# Altium PCB PCB1.PcbDoc
Units mm, origin at the board's own origin, x right, y up, seen from the top; angles counter-clockwise.
Board outline 97 x 63 mm, 2 copper layers (Top Layer, Bottom Layer); 47 components, 44 nets, 228 pads, 0 vias.
Unrouted connection lines stored in the file: 153.
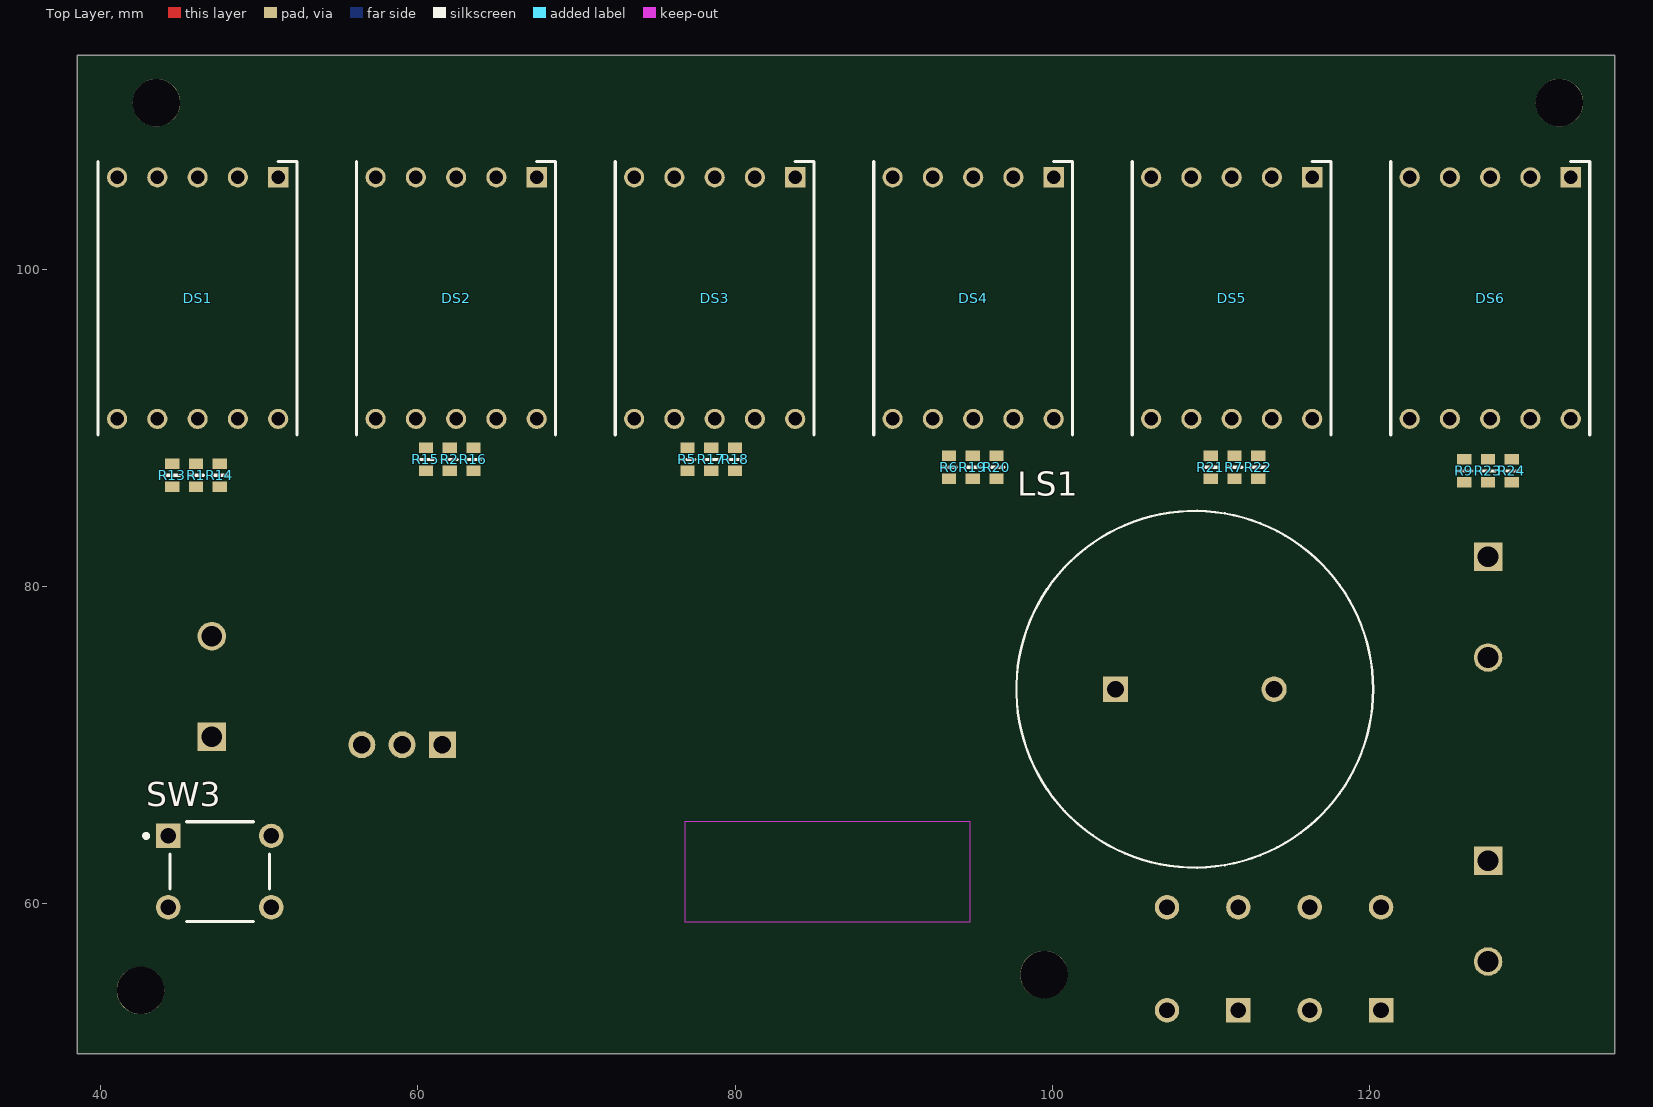
[diagram p0: Top Layer view]
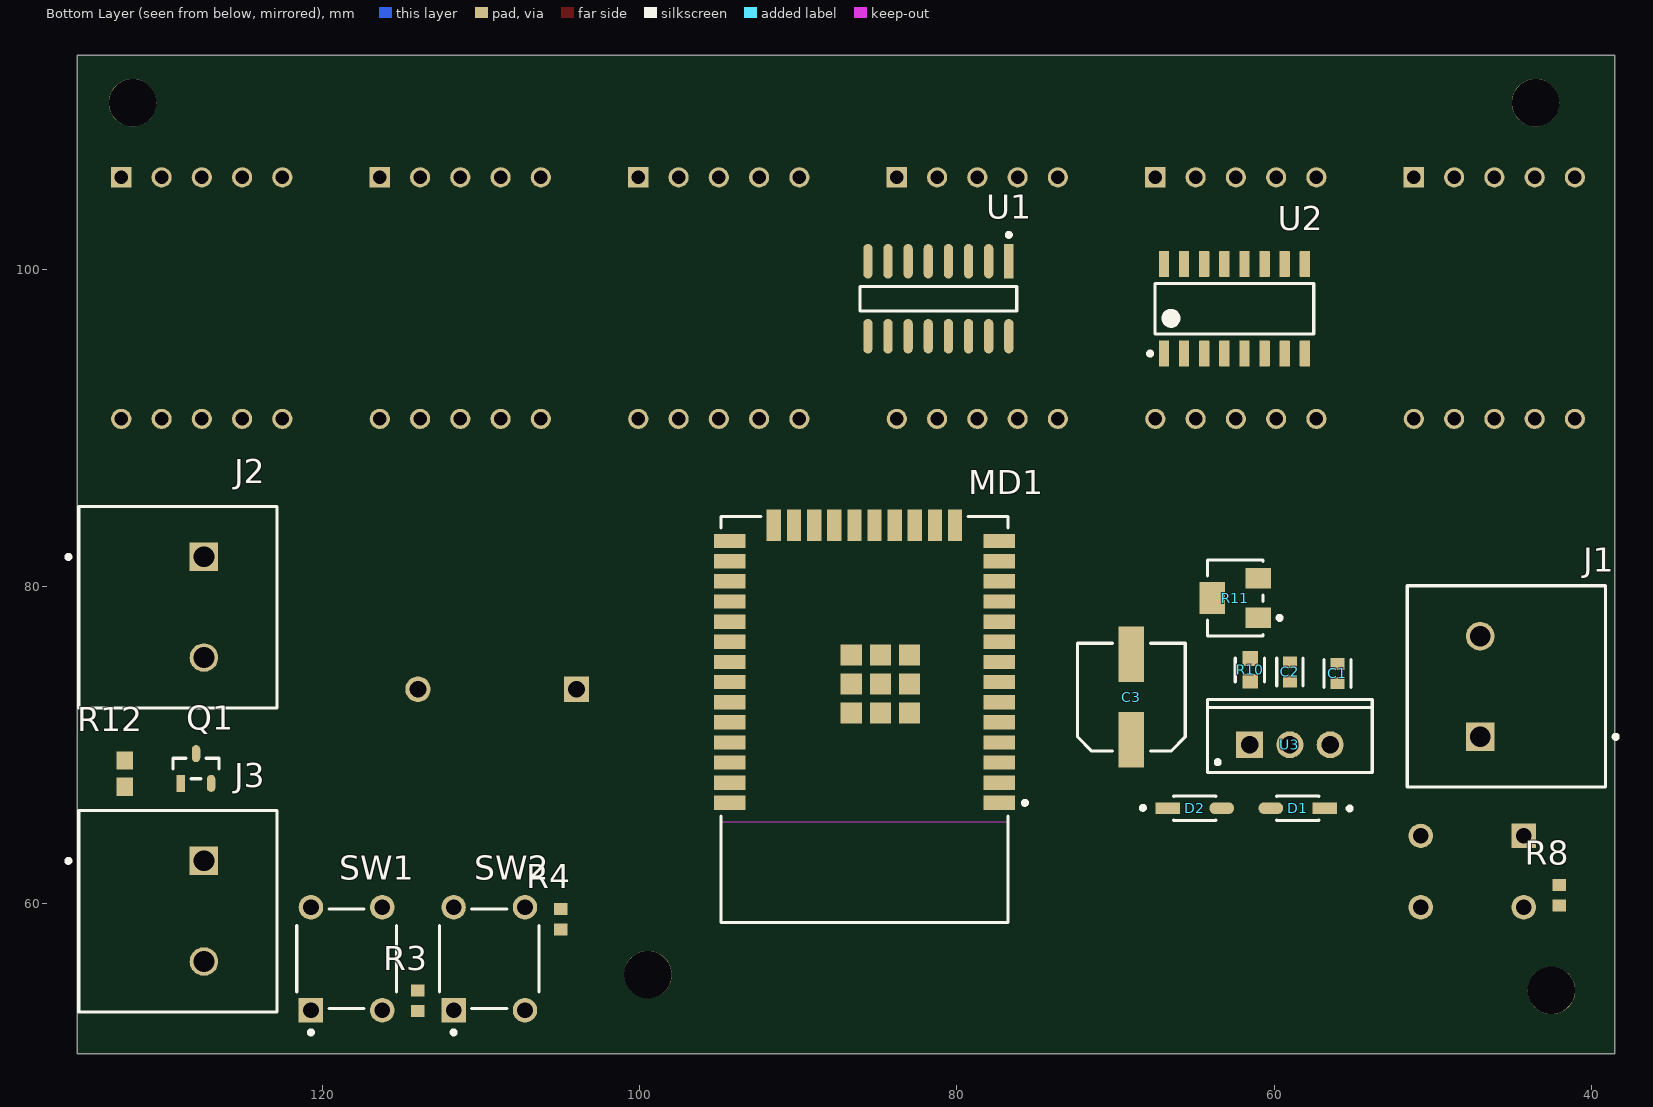
[diagram p1: Bottom Layer view, seen from below]

## Layer stack, top to bottom
Top Solder: solder mask 0.0102, Solder Resist, Dk 3.5
Top Layer: signal copper 0.0356
Dielectric 1: dielectric 0.32, FR-4, Dk 4.8
Bottom Layer: signal copper 0.0356
Bottom Solder: solder mask 0.0102, Solder Resist, Dk 3.5

## Board outline
38.5,50.5 135.5,50.5 135.5,113.5 38.5,113.5

## Design rules (kind name [scope] priority, off if disabled: settings)
Clearance [All] p1: gap=0.254 ignorepadtopadclearanceinfootprint=FALSE except(0: Arc-Hole Track-Hole SMDPad-Hole THPad-Hole Via-Hole Fill-Hole Poly-Hole Region-Hole Text-Hole)
PolygonConnect [All] p1: connectstyle=Relief reliefconductorwidth=0.254 reliefentries=4 polygonreliefangle="90 Angle" airgapwidth=0.254
RoutingVias [All] p1: holewidth=0.711 width=1.27 viastyle="Through Hole" minholewidth=0.711 minwidth=1.27 maxholewidth=0.711 maxwidth=1.27
SolderMaskExpansion [All] p1: expansion=0.102 istentingtop=FALSE
Width [All] p1: maxlimit=0.254 minlimit=0.254 preferedwidth=0.254
30 further rules are at their usual default settings.

## Components (designator, comment, footprint, x,y, rotation, side; value= is the part's Value field where it differs from the comment)
C1 "0.1uF" FP-C0603C-CF-MFG 56,74.5 r90 bottom value="0.10 μF"
C2 "1uF" FP-C0603C105K3PACTU-MFG 59,74.6 r90 bottom
C3 "10uF" NIC-CAPA2-6.3X5.8_V 69,73 r90 bottom
D1 "1N5819HW-7-F" FP-SOD123-IPC_A 58.5,66 r0 bottom
D2 "1N5819HW-7-F" FP-SOD123-IPC_A 65,66 r180 bottom
DS1 "HDSP-515A" DIPS1524W55P254L1240H800Q10N 51.181,105.791 r270 top
DS2 "HDSP-515A" DIPS1524W55P254L1240H800Q10N 67.488,105.791 r270 top
DS3 "HDSP-515A" DIPS1524W55P254L1240H800Q10N 83.795,105.791 r270 top
DS4 "HDSP-515A" DIPS1524W55P254L1240H800Q10N 100.101,105.791 r270 top
DS5 "HDSP-515A" DIPS1524W55P254L1240H800Q10N 116.408,105.791 r270 top
DS6 "HDSP-515A" DIPS1524W55P254L1240H800Q10N 132.715,105.791 r270 top
J1 "1714955" PHOE-1714955_V 47,73.675 r90 bottom
J2 "1714955" PHOE-1714955_V 127.5,78.675 r270 bottom
J3 "1714955" PHOE-1714955_V 127.5,59.5 r270 bottom
LS1 "PKM22EPPH4001-B0" FP-PKM22EPPH4001-B0-MFG 109,73.5 r0 top
MD1 "ESP32-WROOM-32" FP-ESP32-WROOM-32-MFG 85.835,71.595 r0 bottom
Q1 "NDS355AN" FP-527AG-01-IPC_C 128,68.5 r90 bottom
R1 "ERJ-3EKF33R0V" FP-ERJ3EK-MFG 46,87 r270 top
R2 "ERJ-3EKF33R0V" FP-ERJ3EK-MFG 62,88 r270 top
R3 "10kR" RESC1609X55X30LL15T15 114,53.85 r90 bottom
R4 "10kR" RESC1609X55X30LL15T15 105,59 r270 bottom
R5 "ERJ-3EKF33R0V" FP-ERJ3EK-MFG 77,88 r270 top
R6 "ERJ-3EKF33R0V" FP-ERJ3EK-MFG 93.5,87.5 r270 top
R7 "ERJ-3EKF33R0V" FP-ERJ3EK-MFG 111.5,87.5 r270 top
R8 "10kR" RESC1609X55X30LL15T15 42,60.5 r90 bottom
R9 "ERJ-3EKF33R0V" FP-ERJ3EK-MFG 126,87.275 r270 top
R10 "240R" FP-CRCW0603-e3-IPC_B 61.5,74.715 r270 bottom
R11 "5k" BOUR-3214W_V 62.45,79.25 r0 bottom
R12 "100R" RESC1609X55X30ML10T20 132.5,68.175 r270 bottom
R13 "ERJ-3EKF33R0V" FP-ERJ3EK-MFG 44.5,87 r270 top
R14 "ERJ-3EKF33R0V" FP-ERJ3EK-MFG 47.5,87 r270 top
R15 "ERJ-3EKF33R0V" FP-ERJ3EK-MFG 60.5,88 r270 top
R16 "ERJ-3EKF33R0V" FP-ERJ3EK-MFG 63.5,88 r270 top
R17 "ERJ-3EKF33R0V" FP-ERJ3EK-MFG 78.5,88 r270 top
R18 "ERJ-3EKF33R0V" FP-ERJ3EK-MFG 80,88 r270 top
R19 "ERJ-3EKF33R0V" FP-ERJ3EK-MFG 95,87.5 r270 top
R20 "ERJ-3EKF33R0V" FP-ERJ3EK-MFG 96.5,87.5 r270 top
R21 "ERJ-3EKF33R0V" FP-ERJ3EK-MFG 110,87.5 r270 top
R22 "ERJ-3EKF33R0V" FP-ERJ3EK-MFG 113,87.5 r270 top
R23 "ERJ-3EKF33R0V" FP-ERJ3EK-MFG 127.5,87.275 r270 top
R24 "ERJ-3EKF33R0V" FP-ERJ3EK-MFG 129,87.275 r270 top
SW1 "1-1825910-0" FP-1-1825910-0-MFG 118.5,56.5 r270 bottom
SW2 "1-1825910-0" FP-1-1825910-0-MFG 109.5,56.5 r270 bottom
SW3 "1-1825910-0" FP-1-1825910-0-MFG 47.5,62 r180 top
U1 "SN74HC594D" FP-D0016A-IPC_B 81.175,98.134 r270 bottom
U2 "CD4543BMT" D0016A_M 62.5,97.5 r90 bottom
U3 "LM317T" TO-220 59,70 r180 bottom

## Footprints (in the part's own frame and the unit in brackets; to place one, negate y for a bottom-side part, rotate by r counter-clockwise, add the part's x,y. Pads: shape width x height; smd on the part's side, far side on the other; paste and mask are expansions set on the pad)
BOUR-3214W_V [mm] "SMD, 3-Leads, Body 3.5x4.8mm, Pitch 1.25mm"
  rect 1.6x1.3 smd paste+0: 1(-1.45,1.25) 3(-1.45,-1.25)
  rect 1.6x2 smd paste+0: 2(1.45,0)
  silkscreen extent -2.92,-2.4 1.75,2.4, body extent -1.98,-2.41 1.98,2.41, height 5.28
D0016A_M [mm] "SOIC, 16-Leads, Body 10x4mm, Pitch 1.27mm, IPC Low Density"
  rrect15% 1.65x0.65 smd: 1(-2.825,4.445) 2(-2.825,3.175) 3(-2.825,1.905) 4(-2.825,0.635) 5(-2.825,-0.635) 6(-2.825,-1.905) 7(-2.825,-3.175) 8(-2.825,-4.445) 9(2.825,-4.445) 10(2.825,-3.175) 11(2.825,-1.905) 12(2.825,-0.635) 13(2.825,0.635) 14(2.825,1.905) 15(2.825,3.175) 16(2.825,4.445)
  silkscreen extent -2.95,-5 1.6,5.45, body extent -3,-4.95 3,4.95, height 1.59
DIPS1524W55P254L1240H800Q10N [mm]
  rect 1.275x1.275 hole 0.85: 1(0,0)
  round 1.275 hole 0.85: 2(0,-2.54) 3(0,-5.08) 4(0,-7.62) 5(0,-10.16) 6(15.24,-10.16) 7(15.24,-7.62) 8(15.24,-5.08) 9(15.24,-2.54) 10(15.24,0)
  silkscreen extent -1,-11.35 16.24,1.19, body extent -0.93,-11.28 16.17,1.12, height 8
FP-1-1825910-0-MFG [mm]
  rect 1.54x1.54 hole 0.99 paste-1000 mask+0: 1(3.25,-2.25)
  round 1.54 hole 0.99 paste-1000 mask+0: 2(-3.25,-2.25) 3(3.25,2.25) 4(-3.25,2.25)
  silkscreen extent -3.15,-3.15 4.77,3.15, body extent -3.9,-3 3.9,3, height 7.3
FP-527AG-01-IPC_C [mm]
  rect 1.075x0.538 smd paste+0 mask+0: 1(-0.935,0.95)
  rrect100% 1.075x0.538 smd paste+0 mask+0: 2(-0.935,-0.95) 3(0.935,0)
  silkscreen extent -0.65,-1.46 0.65,1.46, body extent -1.2,-1.46 1.2,1.44, height 1.11
FP-C0603C105K3PACTU-MFG [mm]
  rect 0.75x0.9 smd paste+0 mask+0: 1(-0.6,0) 2(0.6,0)
  silkscreen extent -0.87,-0.82 0.87,0.82, body extent -0.8,-0.4 0.8,0.4, height 0.95
FP-C0603C-CF-MFG [mm]
  rect 0.75x0.9 smd paste+0 mask+0: 1(-0.6,0) 2(0.6,0)
  silkscreen extent -0.87,-0.85 0.88,0.85, body extent -0.8,-0.4 0.8,0.4, height 0.87
FP-CRCW0603-e3-IPC_B [mm]
  rect 0.935x0.962 smd paste+0 mask+0: 1(-0.715,0) 2(0.715,0)
  silkscreen extent -0.75,-0.95 0.75,0.9, body extent -0.77,-0.43 0.77,0.43, height 0.5
FP-D0016A-IPC_B [mm]
  rect 2.174x0.582 smd paste+0 mask+0: 1(-2.366,4.445)
  rrect100% 2.174x0.582 smd paste+0 mask+0: 2(-2.366,3.175) 3(-2.366,1.905) 4(-2.366,0.635) 5(-2.366,-0.635) 6(-2.366,-1.905) 7(-2.366,-3.175) 8(-2.366,-4.445) 9(2.366,-4.445) 10(2.366,-3.175) 11(2.366,-1.905) 12(2.366,-0.635) 13(2.366,0.635) 14(2.366,1.905) 15(2.366,3.175) 16(2.366,4.445)
  silkscreen extent -4.15,-4.95 0.78,4.95, body extent -3,-4.95 3,4.95, height 1.75
FP-ERJ3EK-MFG [mm]
  rect 0.65x0.9 smd paste+0 mask+0: 1(-0.725,0) 2(0.725,0)
  silkscreen extent 0,-0.48 0,0.48, body extent -1.15,-0.58 1.15,0.58, height 0.25
FP-ESP32-WROOM-32-MFG [mm]
  rect 2x0.9 smd paste+0 mask+0: 1(-8.5,5.26) 2(-8.5,3.99) 3(-8.5,2.72) 4(-8.5,1.45) 5(-8.5,0.18) 6(-8.5,-1.09) 7(-8.5,-2.36) 8(-8.5,-3.63) 9(-8.5,-4.9) 10(-8.5,-6.17) 11(-8.5,-7.44) 12(-8.5,-8.71) 13(-8.5,-9.98) 14(-8.5,-11.25) 25(8.5,-11.25) 26(8.5,-9.98) 27(8.5,-8.71) 28(8.5,-7.44) 29(8.5,-6.17) 30(8.5,-4.9) 31(8.5,-3.63) 32(8.5,-2.36) 33(8.5,-1.09) 34(8.5,0.18) 35(8.5,1.45) 36(8.5,2.72) 37(8.5,3.99) 38(8.5,5.26)
  rect 0.9x2 smd paste+0 mask+0: 15(-5.715,-12.25) 16(-4.445,-12.25) 17(-3.175,-12.25) 18(-1.905,-12.25) 19(-0.635,-12.25) 20(0.635,-12.25) 21(1.905,-12.25) 22(3.175,-12.25) 23(4.445,-12.25) 24(5.715,-12.25)
  rect 1.33x1.33 smd paste+0 mask+0: 39(-2.835,-4.075) 39(-2.835,-2.24) 39(-2.835,-0.405) 39(-1,-4.075) 39(-1,-2.24) 39(-1,-0.405) 39(0.835,-4.075) 39(0.835,-2.24) 39(0.835,-0.405)
  Keep-Out Layer region: -9,12.75 9,12.75 9,6.45 -9,6.45
  Keep-Out Layer region: -9,12.75 9,12.75 9,6.45 -9,6.45
  silkscreen extent -10.25,-12.8 9.05,12.8, body extent -9,-12.75 9,12.75, height 3.2
FP-PKM22EPPH4001-B0-MFG [mm]
  rect 1.6x1.6 hole 1.05 paste-1000 mask+0: 1(-5,0)
  round 1.6 hole 1.05 paste-1000 mask+0: 2(5,0)
  silkscreen extent -11.25,-11.25 11.25,11.25, body extent -11.35,-11.35 11.35,11.35, height 0.25
FP-SOD123-IPC_A [mm]
  rect 1.557x0.742 smd paste+0 mask+0: 1(-1.7,0)
  rrect100% 1.557x0.742 smd paste+0 mask+0: 2(1.7,0)
  silkscreen extent -3.39,-0.77 1.33,0.77, body extent -1.83,-0.77 1.83,0.77, height 1.45
NIC-CAPA2-6.3X5.8_V [mm] "Aluminum Electrolytic Capacitor, Diameter 6.3mm, Height 6.1mm, Pitch 5.4mm"
  rect 3.5x1.6 smd: 1(-2.7,0) 2(2.7,0)
  silkscreen extent -3.4,-3.4 3.4,3.4, body extent -3.15,-3.15 3.15,3.15, height 6.1
PHOE-1714955_V [mm] "Terminal Block, 2-Leads, Body 12.7x12.5mm, Pitch 6.35mm"
  rect 1.8x1.8 hole 1.3: 1(-3.175,0)
  round 1.8 hole 1.3: 2(3.175,0)
  silkscreen extent -6.35,-8.67 6.35,4.6, body extent -6.92,-7.9 6.35,4.6, height 21.51
RESC1609X55X30LL15T15 [mm] "Chip Resistor, 2-Leads, Body 1.75x0.95mm, IPC High Density"
  rect 0.75x0.85 smd: 1(-0.65,0) 2(0.65,0)
  body extent -0.87,-0.48 0.87,0.48, height 0.55
RESC1609X55X30ML10T20 [mm] "Chip Resistor, 2-Leads, Body 1.60x0.85mm, IPC Low Density"
  rect 1.15x1.05 smd: 1(-0.825,0) 2(0.825,0)
  body extent -0.85,-0.48 0.85,0.48, height 0.55
TO-220 [mm] "TO, Thru-Hole, Vertical, Heatsink Mounted; 3 In-Line Leads; Pitch 2.54 mm"
  rect 1.7x1.7 hole 1.1: 1(-2.54,0)
  round 1.7 hole 1.1: 2(0,0) 3(2.54,0)
  silkscreen extent -5.2,-1.75 5.2,2.85, body extent -5.25,-1.8 5.25,2.9, height 19.7

## Part data
C1: library part CMP-2006-03061-2, "CAP CER 0.1UF 50V X7R 0603", Capacitance="0.10 μF", Manufacturer=KEMET, Manufacturer Part Number=C0603C104K5RACTU, Package=C0603C-CF, Temperature="-55°C to +125°C", Temperature Characteristic=X7R, Temperature Coefficient=30ppm/°C, Temperature Range High=+125°C, Temperature Range Low=-55°C, Tolerance=0.1, Voltage Rating="50 V", Automotive=Yes, Automotive Grade="Grade 1", Category=Cap, ComponentLink2Description=Datasheet, ComponentLink2URL=https://api.kemet.com/component-edge/download/datasheet/C0603C100J5GACAUTO.pdf, Device Class L1="Passive Components", Device Class L2=Capacitors, Device Class L3="Ceramic Capacitors", Digikey Description="CAP CER 0.1UF 50V X7R 0603", Height=0.87mm, Lead Free=Yes, Material=Ceramic, Octopart=https://octopart.com/c0603c104k5ractu-kemet-139244, RoHS=TRUE
C2: library part CMP-2006-02216-3, "CAP CER 1UF 25V X5R 0603", Case Code (Imperial)=0603, Case Code (Metric)=1608, Dielectric=X5R, Dielectric Material=Ceramic, Max Operating Temperature=85°C, Min Operating Temperature=-55°C, Package Quantity=4000, Tolerance=10%, Voltage=25V, Capacitance=1uF, Case/Package=0603, Construction=Flat, Contact Plating=Tin, Depth=0.8mm, Height=0.8mm, Lead Free="Lead Free", Length=1.6mm, Mount="Surface Mount", Number of Pins=2, Packaging="Tape and Reel", Radiation Hardening=No, REACH SVHC="No SVHC", RoHS Compliant=Yes, Series=C0603C, Termination=SMD/SMT, Thickness=0.034inch, Voltage Rating=25V, Voltage Rating (DC)=25V, Width=0.031inch
C3: library part CMP-0687-00043-1, "Aluminum Electrolytic Capacitor, UD Series, Low Impedance, 10 uF, 50 V, + / - 20%, -55 to 105 degC, Chip Type, 6.3 x 5.8 mm D x L, Pb-Free, Reel", Manufacturer=Nichicon, PartNumber=UUD1H100MCL1GS, Rated Capacitance="10 uF", Rated Ripple Current (at 100kHz)="165 mA", Rated Voltage="50 V", Tolerance Rated Capacitance="-20 to 20%", ComponentLink1Description="Manufacturer URL", ComponentLink1URL=http://www.nichicon.co.jp/, ComponentLink2Description=Datasheet, ComponentLink2URL=http://products.nichicon.co.jp/en/pdf/XJA043/e-ud.pdf, ComponentLink3Description="Package Specification", ComponentLink3URL=http://products.nichicon.co.jp/en/pdf/XJA043/e-ud.pdf, DatasheetVersion=08/2012, Diameter="6.3 mm", Endurance Time="2000 h", Impedance="0.88 Ohm", Length="5.8 mm", Mounting Technology="Surface Mount", PackageDescription="2-Pin Surface Mount Device, Diameter 6.3 mm, Height 5.8 mm, Pitch 5.4 mm", PackageReference=CAPAE-D6.3H5.8, Packing="Dia382mm Reel", RoHS=TRUE
D1 D2: library part CMP-0303-00003-3, "DIODE SCHOTTKY 40V 1A SOD123", Average Rectified Current=1A, Capacitance=110pF, Case/Package=SOD-123-2, Forward Voltage=450mV, Max Forward Surge Current (Ifsm)=25A, Max Operating Temperature=125°C, Max Power Dissipation=450mW, Max Repetitive Reverse Voltage (Vrrm)=40V, Min Operating Temperature=-65°C, Package Quantity=3000, Peak Reverse Current=50uA, Contact Plating=Tin, Current Rating=1A, Element Configuration=Single, Forward Current=1A, Height=1.25mm, Lead Free="Lead Free", Length=2.85mm, Max Reverse Voltage (DC)=40V, Number of Pins=2, Output Current=1A, Packaging="Tape and Reel", Peak Non-Repetitive Surge Current=25A, Polarity=Standard, Radiation Hardening=No, REACH SVHC="No SVHC", Termination=SMD/SMT, Voltage Rating (DC)=40V, Weight=0.000353oz, Width=1.7mm
DS1 DS2 DS3 DS4 DS5 DS6: "Display", Manufacturer_Name="Avago Technologies", Mouser Part Number=630-HDSP-515A, Height=8mm, Manufacturer_Part_Number=HDSP-515A, Mouser Price/Stock=https://www.mouser.co.uk/ProductDetail/Broadcom-Avago/HDSP-515A?qs=T3oQrply3y8Gvd653rH%2Fgg%3D%3D
J1 J2 J3: library part CMP-2000-05797-1, "PC Terminal Block, Pitch 6.35 mm, 1 x 2 Position, Height 21.5 mm, Tail Lenght 5.1 mm, RoHS, Bulk", Manufacturer="Phoenix Contact", Package Description="PC Terminal Block, Pitch 6.35 mm, 1 x 2 Position, Height 21.5 mm, Tail Lenght 5.1 mm", Datasheet URL=http://media.digikey.com/pdf/Data%20Sheets/Phoenix%20Contact%20PDFs/1714955.pdf, Datasheet Version=02/2010, Manufacturer URL=http://www.phoenixcontact.com/, Mounting Technology=ThroughHole, Package Reference=1714955
LS1: library part CMP-2000-06903-2, "AUDIO PIEZO TRANSDUCER 30V TH", Capacitance=12nF, Frequency=4kHz, Max Operating Temperature=70°C, Max Supply Voltage=25V, Min Operating Temperature=-20°C, Nominal Input Voltage=3V, Package Quantity=900, Diameter=22mm, Height=7mm, Lead Free="Lead Free", Max Frequency=4kHz, Mount="Through Hole", Packaging=Bulk, Radiation Hardening=No, REACH SVHC="No SVHC", Self Resonant Frequency=4kHz, Termination=Solder, Voltage Rating=3V, Washable=No
MD1: library part CMP-194065-000008-1, "RX TXRX MOD WIFI SURFACE MOUNT", Case/Package=SMD/SMT, Frequency=2.5GHz, Max Operating Temperature=85°C, Min Operating Temperature=-40°C, Operating Supply Voltage=3.6V, Package Quantity=550, Data Rate=150Mbps, Mount="Surface Mount", Packaging="Cut Tape", Sensitivity=-98dBm, Weight=0.088185oz
Q1: library part CMP-2000-06834-2, "MOSFET N-CH 30V 1.7A SSOT3", Continuous Drain Current=1.7A, Drain To Source Breakdown Voltage=30V, Drain To Source Resistance=0.105Ω, Gate To Source Voltage=20V, Input Capacitace At Vds="195pF @ 15V", Manufacturer="ON Semiconductor", Max Forward Diode Voltage=1.2V, Max Junction Temp=+150°C, Package=527AG-01, Power Dissipation=0.46W, Pulse Drain Current=10A, Temperature="-55°C to +150°C", Temperature Range Low=-55°C, Typ Forward Diode Voltage=0.8V, Automotive=No, Category=Trans, ComponentLink2Description=Datasheet, ComponentLink2URL=https://www.onsemi.com/pub/Collateral/NDS355AN-D.PDF, Depletion Mode=False, Device Class L1="Discrete Semiconductors", Device Class L2=Transistors, Device Class L3=MOSFETs, Digikey Description="MOSFET N-CH 30V 1.7A SSOT3", Drain To Source Voltage=30V, Footprint Url=https://www.onsemi.com/pub/Collateral/527AG.PDF, Gate Charge At Vgs="3.5nC @ 5V", Height=1.22mm, Lead Free=Yes, Manufacturer Part Number=NDS355AN, Mouser Description="MOSFET SOT-23 N-CH LOGIC", Number Of Channels=1, Number Of N Channels=1, Octopart=https://octopart.com/nds355an-on+semiconductor-84330922, RoHS=TRUE, Rthja Max=250°C/W, Standoff Height=0.013mm, Temperature Range High=+150°C, Threshold Vgs Max=2V, Threshold Vgs Min=1V, Transconductance=3.5S, Turn Off Delay Time=13ns, Turn On Delay Time=10ns
R1 R2 R5 R6 R7 R9 R13 R14 R15 R16 R17 R18 R19 R20 R21 R22 R23 R24: library part CMP-2000-00443-2, "RES SMD 33 OHM 1% 1/10W 0603", Case Code (Imperial)=0603, Case Code (Metric)=1608, Max Operating Temperature=155°C, Max Power Dissipation=100mW, Min Operating Temperature=-55°C, Package Quantity=1, Resistance=33R, Resistance Tolerance=1%, Resistor Type="Thick Film", Temperature Coefficient=100ppm/°C, Voltage Rating=75V, Case/Package=0603, Construction=Rectangular, Contact Plating=Tin, Depth=0.8mm, Features="Automotive AEC-Q200", Height=0.022inch, Lead Free="Lead Free", Length=1.6mm, Military Standard=Not, Mount="Surface Mount", Number of Pins=2, Number of Terminations=2, Packaging="Tape and Reel", Power Rating=100mW, Radiation Hardening=No, REACH SVHC="No SVHC", RoHS Compliant=Yes, Series=ERJ, Size Code=0603, Termination=SMD/SMT, Tolerance=1%, Voltage Rating (DC)=75V, Width=0.031inch
R3 R4 R8: library part CMP-1012-00623-3, "Chip Resistor, 10 KOhm, +/- 1%, 0.1 W, -55 to 155 degC, 0603 (1608 Metric), RoHS, Tape and Reel", Case Code (Imperial)=0603, Case Code (Metric)=1608, Manufacturer=Panasonic, Max Operating Temperature=155degC, Max Power Dissipation=100mW, Min Operating Temperature=-55degC, Package Description="2-Pin Surface Mount Device, Body 1.6 x 0.85 mm", Package Quantity=1, Package Reference=603, Resistance=10KOhm, Temperature Coefficient=100ppm\/degreesC, Tolerance=1%, Voltage Rating=75V, Case\/Package=0603, Composition=ThickFilm, Contact Plating=Tin, Datasheet URL=https://industrial.panasonic.com/cdbs/www-data/pdf/RDA0000/AOA0000C304.pdf, Datasheet Version=02/2017, Depth=0.8mm, Height=0.45mm, Lead Free=LeadFree, Length=1.6mm, Manufacturer URL=http://www.panasonic.com/, Military Standard=Not, Mount=SurfaceMount, Mounting Technology=SurfaceMount, Number of Pins=2, Number of Terminations=2, Packaging=TapeandReel, Power Rating=100mW, Radiation Hardening=No, REACH SVHC=NoSVHC, RoHSCompliant=true, Termination=SMD/SMT, Voltage Rating (DC)=75V, Width=0.031inch
R10: library part CMP-2000-03111-2, "RES Thick Film, 240Ω, 1%, 0.1W, 100ppm/°C, 0603", Case Code (Imperial)=0603, Case Code (Metric)=1608, Max Operating Temperature=155°C, Max Power Dissipation=100mW, Min Operating Temperature=-55°C, Package Quantity=10, Resistance Tolerance=1%, Resistor Type="Thick Film", Temperature Coefficient=100ppm/°C, Voltage Rating=75V, Case/Package=0603, Construction=Rectangular, Contact Plating=Tin, Depth=0.85mm, Features="Automotive AEC-Q200", Height=0.45mm, Lead Free="Lead Free", Length=1.55mm, Military Standard=Not, Mount="Surface Mount", Number of Terminations=2, Packaging="Tape and Reel", Power Rating=100mW, Radiation Hardening=No, Resistance=240R, RoHS Compliant=Yes, Series=CRCW, Size Code=0603, Technology="THICK FILM", Termination=SMD/SMT, Tolerance=1%, Voltage Rating (DC)=75V, Weight=7.1E-05oz, Width=0.033inch
R11: library part CMP-2000-05579-1, "3214 - 5-Turn Trimpot(R) Trimming Potentiometer, 5 KOhm, +/- 10%, 0.25 W, -65 to 150 degC, RoHS, Tape and Reel", Manufacturer=Bourns, Package Description="3-Pin Surface Mount Device, Body 3.5 x 4.8 mm, Pitch 1.25 mm", Package Reference=3214W, Power Rating=250mW, Resistance Tolerance=±10%, Temperature Coefficient=±100ppm/°C, Track Resistance=5kohm, Datasheet URL=http://www.bourns.com/docs/Product-Datasheets/3214.pdf, Datasheet Version=05/2016, Manufacturer URL=http://www.bourns.com/, Mounting Technology=SurfaceMount, No. of Turns=5, Potentiometer Mounting=SMD, RoHS Compliant=Yes, SVHC=NoSVHC(16-Jun-2014)
R12: library part CMP-2000-03688-1, Manufacturer="Vishay Dale", Part Number=TNPW0603100RBEEA
SW1 SW2 SW3: library part CMP-03407-000018-1, "SWITCH TACTILE SPST-NO 0.05A 24V", Actuator Color=Blue, Contact Current Rating=50mA, Contact Resistance=100mR, Max Operating Temperature=85°C, Max Voltage Rating (DC)=24V, Min Operating Temperature=-35°C, Operating Force=1.56N, Package Quantity=750, Actuator Length=3.4mm, Actuator Material=Nylon, Actuator Type=Standard, Contact Material=Brass, Contact Plating=Silver, Depth=5.99mm, Electrical Life=100000Cycles, Illumination Type=Non-Illuminated, Length=5.99mm, Max Current Rating=50mA, Mechanical Life=100000Cycles, Mount="Through Hole", Orientation=Straight, Packaging="Loose Piece", Radiation Hardening=No, RoHS Compliant=Yes, Series="FSMJ, Alcoswitch", Switch Function=Off-Mom, Switch Travel=0.25mm, Termination="PC Pins", Throw Configuration=SPST, Type=Switch, Voltage Rating (DC)=24V
U1: library part CMP-0780-00060-4, "IC 8-BIT SHIFT REGISTER 16-SOIC", Case/Package=SOIC, Max Operating Temperature=125°C, Max Supply Voltage=6V, Min Operating Temperature=-40°C, Min Supply Voltage=2V, Operating Supply Voltage=5V, Package Quantity=40, Direction=Unidirectional, Height=1.58mm, Lead Free="Lead Free", Length=9.9mm, Logic Function="Shift Register", Mount="Surface Mount", Number of Bits=8, Number of Bits per Element=8, Number of Circuits=4, Number of Elements=1, Number of Output Lines=10, Number of Pins=16, Packaging=Rail/Tube, Propagation Delay=185ns, Radiation Hardening=No, REACH SVHC="No SVHC", Series=74HC, Technology=CMOS, Turn-On Delay Time=185ns, Weight=0.004998oz, Width=3.91mm
U2: library part CMP-0388-00034-2, "CMOS BCD-to-7-Segment Latch / Decoder / Driver for Liquid-Crystal Displays, 3 V, -55 to 125 degC, 16-pin SOIC (D16), Green (RoHS & no Sb/Br)", Manufacturer="Texas Instruments", Rating=Catalog, Code_JEDEC=MS-012, ComponentLink1Description="Manufacturer URL", ComponentLink1URL=http://www.ti.com/, ComponentLink2Description=Datasheet, ComponentLink2URL=http://www.ti.com/general/docs/lit/getliterature.tsp?genericPartNumber=CD4543B&fileType=pdf, ComponentLink3Description="Package Specification", ComponentLink3URL=http://www.ti.com/litv/pdf/mpds178g, DatasheetVersion=SCHS086D, Eco-Plan="Green (RoHS & no Sb/Br)", Mounting Technology="Surface Mount", PackageDescription="16-Pin Plastic Small Outline, Body 9.90 x 3.90 mm, Pitch 1.27 mm", PackageReference=D0016A, PackageVersion=4040047-6/M, PartNumber=CD4543BMT, SubFamily="Discrete Segment LED Driver", Vin(Min)(V)=3
U3: library part CMP-0244-00444-1, "1.5A, 1.2V to 37V Adjustable Voltage Regulator, 3-Pin TO-220", ComponentLink1Description="Manufacturer URL", ComponentLink1URL=http://www.st.com, ComponentLink2Description=Datasheet, ComponentLink2URL=http://www.st.com/internet/com/TECHNICAL_RESOURCES/TECHNICAL_LITERATURE/DATASHEET/CD00000455.pdf, ComponentLink3Description="Package Specification", ComponentLink3URL=http://www.st.com/internet/com/TECHNICAL_RESOURCES/TECHNICAL_LITERATURE/PACKAGE_INFORMATION/CD00004649.pdf, DatasheetVersion=1/11/2011, PackageDescription="TO, Thru-Hole, Vertical, Heatsink Mounted; 3 In-Line Leads; Pitch 2.54 mm", PackageReference=TO-220, PackageVersion=2011

## Free pads (board coordinates)
  round 3 hole 3 unplated mask+0: 1(42.5,54.5) 1(43.5,110.5) 1(99.5,55.5) 1(132,110.5)

## Nets (pads, with @x,y where several pads share a name; then routed paths per layer and width w, separated by ;. In a path a pad name is that pad's centre, name@x,y a point inside that pad or via, vN(x,y) a via of type N, cw(c..) or ccw(c..) an arc to the next point about the centre after c; other vN are vias at no path point)
3V3: C2.1 D1.2 D2.1 MD1.2 R3.2 R4.2 R8.2 R10.2 U1.16 U2.16 U3.2
A: DS1.7 DS2.7 DS3.7 DS4.7 DS5.7 DS6.7 U2.9
B: DS1.6 DS2.6 DS3.6 DS4.6 DS5.6 DS6.6 U2.10
BOOT: MD1.25 R3.1 SW1.3
BTN: MD1.13 R8.1 SW3.3
C: DS1.4 DS2.4 DS3.4 DS4.4 DS5.4 DS6.4 U2.11
D: DS1.2 DS2.2 DS3.2 DS4.2 DS5.2 DS6.2 U2.12
DIGIT_1: R1.2 R13.2 R14.2 U1.15
DIGIT_2: R2.2 R15.2 R16.2 U1.1
DIGIT_3: R5.2 R17.2 R18.2 U1.2
DIGIT_4: R6.2 R19.2 R20.2 U1.3
DIGIT_5: R7.2 R21.2 R22.2 U1.4
DIGIT_6: R9.2 R23.2 R24.2 U1.5
DOT: DS1.5 DS2.5 DS3.5 DS4.5 DS5.5 DS6.5
E: DS1.1 DS2.1 DS3.1 DS4.1 DS5.1 DS6.1 U2.13
EN: MD1.3 R4.1 SW2.4
EXPLO_OUT: J3.1 Q1.2
EXPLO_PIN: MD1.16 R12.1
F: DS1.9 DS2.9 DS3.9 DS4.9 DS5.9 DS6.9 U2.15
G: DS1.10 DS2.10 DS3.10 DS4.10 DS5.10 DS6.10 U2.14
GND: C1.2 C2.2 C3.2 J1.2 J2.2 J3.2 LS1.2 MD1.1 MD1.15 MD1.38 MD1.39 R10.1 R11.1 SW1.1 SW2.1 SW3.1 U1.8 U2.8
NetC3_1: C3.1 D2.2 R11.2 U3.1
NetDS1_3: DS1.3 DS1.8 R1.1 R13.1 R14.1
NetDS2_3: DS2.3 DS2.8 R2.1 R15.1 R16.1
NetDS3_3: DS3.3 DS3.8 R5.1 R17.1 R18.1
NetDS4_3: DS4.3 DS4.8 R6.1 R19.1 R20.1
NetDS5_3: DS5.3 DS5.8 R7.1 R21.1 R22.1
NetDS6_3: DS6.3 DS6.8 R9.1 R23.1 R24.1
NetMD1_8: MD1.8 U2.1
NetMD1_9: MD1.9 U2.7
NetMD1_10: MD1.10 U2.3
NetMD1_11: MD1.11 U2.2
NetMD1_12: MD1.12 U2.4
NetMD1_28: MD1.28 U1.13
NetMD1_30: MD1.30 U1.12
NetMD1_31: MD1.31 U1.10
NetMD1_33: MD1.33 U1.11
NetMD1_36: MD1.36 U1.14
NetMD1_37: MD1.37 U2.5
NetQ1_1: Q1.1 R12.2
PHASE: MD1.27 U2.6
PIEZO: LS1.1 MD1.23
VBAT: C1.1 D1.1 J1.1 U3.3
VBAT_EXPLO: J2.1 Q1.3
pads on no net: MD1.4 MD1.5 MD1.6 MD1.7 MD1.14 MD1.17 MD1.18 MD1.19 MD1.20 MD1.21 MD1.22 MD1.24 MD1.26 MD1.29 MD1.32 MD1.34 MD1.35 R11.3 SW1.2 SW1.4 SW2.2 SW2.3 SW3.2 SW3.4 U1.6 U1.7 U1.9